# Altium PCB PCB2.PcbDoc
Units mil, origin at the board's own origin, x right, y up, seen from the top; angles counter-clockwise.
Board outline 1560 x 810 mil, 2 copper layers (Top Layer, Bottom Layer); 64 components, 103 nets, 334 pads, 4 vias.
Unrouted connection lines stored in the file: 122.
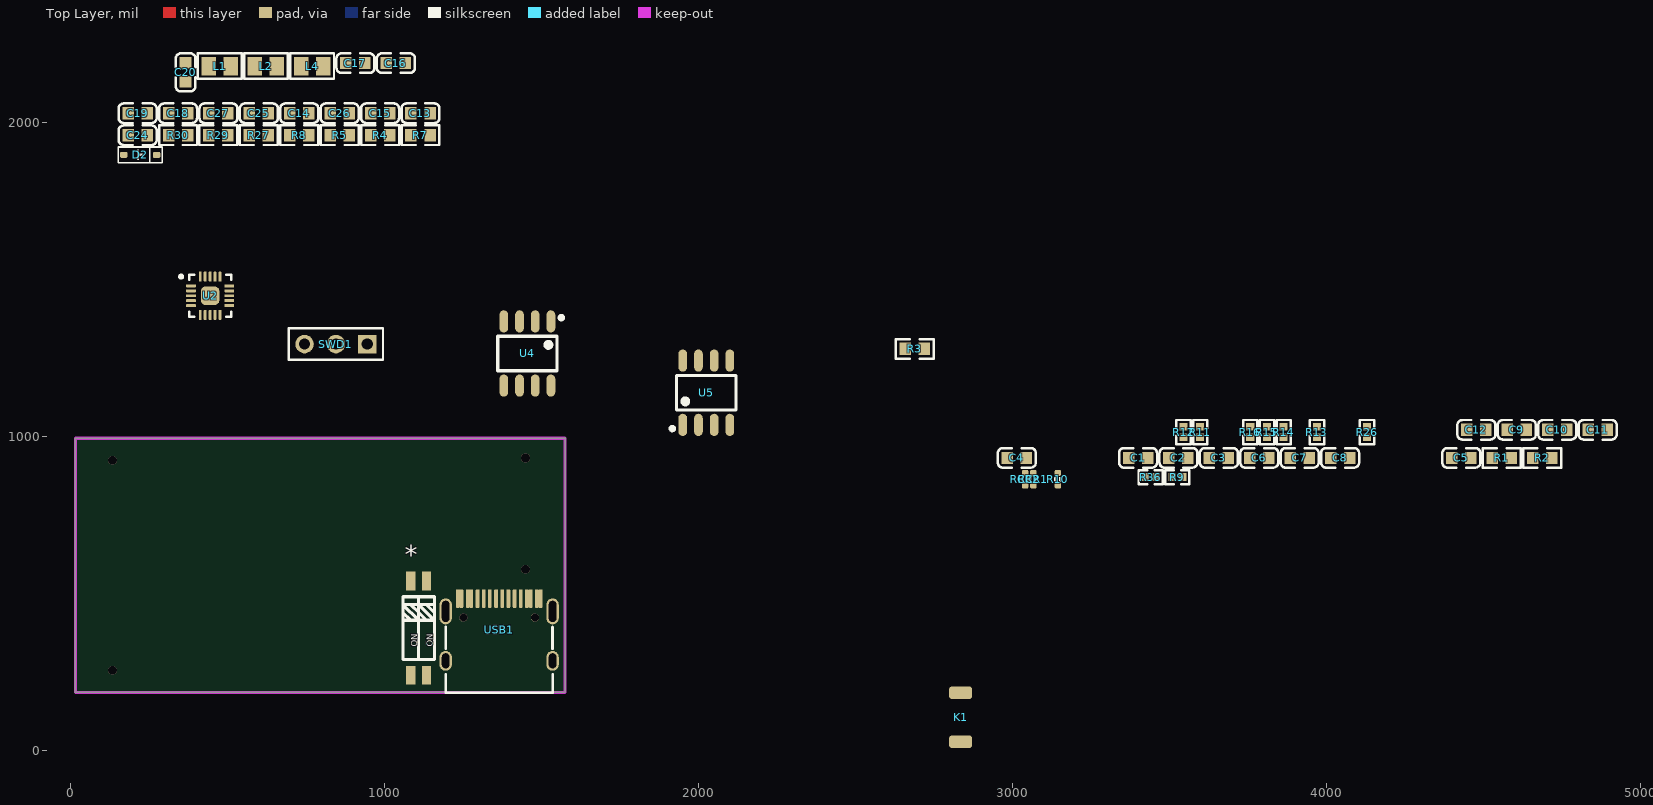
[diagram p0: Top Layer view]
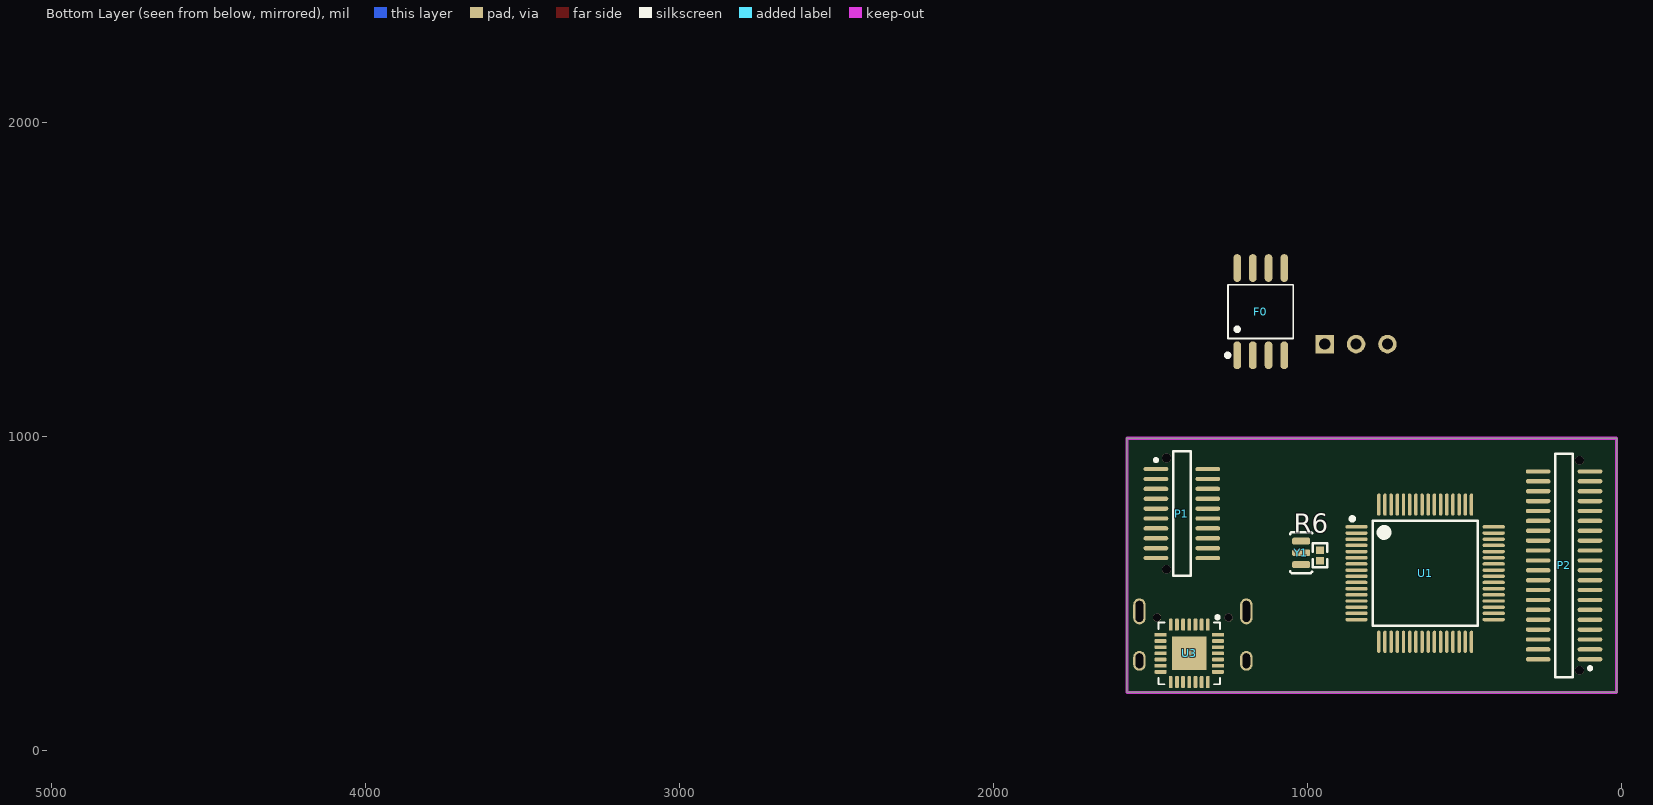
[diagram p1: Bottom Layer view, seen from below]

## Layer stack, top to bottom
Top Solder: solder mask 0.4, Solder Resist, Dk 3.5
Top Layer: signal copper 1.4
Dielectric 1: dielectric 12.6, FR-4, Dk 4.8
Bottom Layer: signal copper 1.4
Bottom Solder: solder mask 0.4, Solder Resist, Dk 3.5

## Board outline
15,185 15,995 1575,995 1575,185

## Design rules (kind name [scope] priority, off if disabled: settings)
Clearance [All] p1: gap=6 ignorepadtopadclearanceinfootprint=FALSE
ComponentClearance [All] p1: gap=0 collisioncheckmode=3 verticalgap=0 showdistances=FALSE
DiffPairsRouting [All] p1: maxlimit=9 minlimit=9 mostfreqgap=9 toplayer_minwidth=4 toplayer_maxwidth=4 toplayer_prefwidth=4 bottomlayer_minwidth=4 bottomlayer_maxwidth=4 bottomlayer_prefwidth=4 maxuncoupledlength=500
FanoutControl Fanout_BGA [All] p1: bgadir=Out bgaviamode=Centered fanoutstyle=Auto fanoutdirection=Alternating viagrid=1 // Fanout_BGA (Default Rule)
HoleSize [All] p1: absolutevalues=TRUE maxlimit=10000 minlimit=8 maxpercent=80.000 minpercent=20.000
MinimumSolderMaskSliver [All] p1 off: minsoldermaskwidth=2
PlaneClearance [All] p1: clearance=8
PlaneConnect [All] p1: planeconnectstyle=Direct reliefexpansion=20 reliefentries=4 reliefconductorwidth=10 reliefairgap=10
PolygonConnect [All] p1: connectstyle=Direct reliefconductorwidth=10 reliefentries=4 polygonreliefangle="90 Angle" airgapwidth=10
RoutingVias [All] p1: holewidth=8 width=16 viastyle="Through Hole" minholewidth=6 minwidth=12 maxholewidth=28 maxwidth=50
SilkToSilkClearance [All] p1: silktosilkclearance=0
SilkToSolderMaskClearance [IsPad] p1: minsilkscreentomaskgap=0 clearancetoexposedcopper=TRUE
SolderMaskExpansion [All] p1: expansion=3 istentingtop=FALSE
Width [All] p1: maxlimit=10000 minlimit=6 preferedwidth=6
21 further rules are at their usual default settings.

## Classes and differential pairs
component class Designator: C13 C14 C15 C16 C17 C18 C19 C20 C24 C25 C26 C27 D2 L1 L2 L4 R4 R5 R7 R8 R27 R29 R30 U2
component class main: * P1 P2 R26 R36 RCR1 RCR2 U4 U5
component class Designator: R9 R10 R11 R12 U3 USB1
differential pair CAN2: +CAN2_P -CAN2_N
differential pair CAN1: +CAN1_P -CAN1_N
differential pair USB: +USB_P -USB_N

## Components (designator, comment, footprint, x,y, rotation, side; value= is the part's Value field where it differs from the comment)
* "MC74HC126ADR2G" SW-SMD_4P 1075,350 r180 top
C1 "10uF (106) 10% 10V" LC-0603_C 3400.55,932.58 r0 top
C2 "100nF (104) 10% 50V" LC-0603_C 3529.29,932.58 r0 top
C3 "100nF (104) 10% 50V" LC-0603_C 3658.03,932.58 r0 top
C4 "100nF (104) 10% 50V" LC-0603_C 3014.33,932.58 r0 top
C5 "100nF (104) 10% 50V" LC-0603_C 4430.47,932.58 r0 top
C6 "100nF (104) 10% 50V" LC-0603_C 3786.77,932.58 r0 top
C7 "100nF (104) 10% 50V" LC-0603_C 3915.51,932.58 r0 top
C8 "100nF (104) 10% 50V" LC-0603_C 4044.25,932.58 r0 top
C9 "2.2uF (225) 10% 16V" LC-0603_C 4607.24,1021.95 r0 top
C10 "2.2uF (225) 10% 16V" LC-0603_C 4735.98,1021.95 r0 top
C11 "100nF (104) 10% 50V" LC-0603_C 4864.72,1021.95 r0 top
C12 "100nF (104) 10% 50V" LC-0603_C 4478.5,1021.95 r0 top
C13 "10uF (106) 10% 10V" LC-0603_C 1114.44,2030.42 r0 top
C14 "220pF (221) 10% 50V" LC-0603_C 728.22,2030.42 r0 top
C15 "100nF (104) 10% 50V" LC-0603_C 985.7,2030.42 r0 top
C16 "10uF (106) 10% 10V" LC-0603_C 1035.94,2189.96 r0 top
C17 "10uF (106) 10% 10V" LC-0603_C 907.2,2189.96 r0 top
C18 "220pF (221) 10% 50V" LC-0603_C 342,2030.42 r0 top
C19 "100nF (104) 10% 50V" LC-0603_C 213.26,2030.42 r0 top
C20 "10uF (106) 10% 10V" LC-0603_C 366.06,2160.63 r90 top
C24 "10uF (106) 10% 10V" LC-0603_C 213.26,1960.34 r0 top
C25 "10uF (106) 10% 10V" LC-0603_C 599.48,2030.42 r0 top
C26 "220pF (221) 10% 50V" LC-0603_C 856.96,2030.42 r0 top
C27 "100nF (104) 10% 50V" LC-0603_C 470.74,2030.42 r0 top
D2 "二极管-5819W" SOD-323 221.39,1897.8 r0 top
F0 "W25Q64JVSSIQ" W25Q64JVSSIQ 1180,1415 r180 bottom
K1 "TACT 2P" ButtonTACT_3x4x2_180 2835,106 r90 top value=3x4
L1 "2.2uH ±10%" LC-0805_L 474.72,2180.32 r0 top
L2 "2.2uH ±10%" LC-0805_L 621.97,2180.32 r0 top
L4 "2.2uH ±10%" LC-0805_L 769.21,2180.32 r0 top
P1 "Header 10X2" HEAER_0.8mm_2x10P_M 1400,755 r180 bottom
P2 "Header 20X2" HEADER_0.8mm_2x20P_G 182.32,590 r0 bottom
R1 "10KΩ (1002) ±1%" LC-0603_R 4559.21,932.58 r0 top
R2 "10KΩ (1002) ±1%" LC-0603_R 4687.95,932.58 r0 top
R3 "10KΩ (1002) ±1%" LC-0603_R 2689.68,1280 r0 top
R4 "510KΩ (5103) ±1%" LC-0603_R 985.7,1960.34 r0 top
R5 "110KΩ (1103) ±1%" LC-0603_R 856.96,1960.34 r0 top
R6 "1MΩ (1004) ±1%" LC-0402_R 960,621.73 r270 bottom
R7 "510KΩ (5103) ±1%" LC-0603_R 1114.44,1960.34 r0 top
R8 "110KΩ (1103) ±1%" LC-0603_R 728.22,1960.34 r0 top
R9 "10KΩ (1002) ±1%" LC-0402_R 3525.74,870.97 r0 top
R10 "200R" RES_0402 3144.96,864.54 r90 top value=22R
R11 "5.1KΩ (5101) ±1%" LC-0402_R 3598.58,1014.67 r90 top
R12 "5.1KΩ (5101) ±1%" LC-0402_R 3545.43,1014.67 r90 top
R13 "0Ω (0R0) ±1%" LC-0402_R 3970.63,1014.67 r90 top
R14 "0Ω (0R0) ±1%" LC-0402_R 3864.33,1014.67 r90 top
R15 "0Ω (0R0) ±1%" LC-0402_R 3811.18,1014.67 r90 top
R16 "0Ω (0R0) ±1%" LC-0402_R 3758.03,1014.67 r90 top
R26 "120Ω (1200) ±1%" LC-0402_R 4130.08,1014.67 r90 top
R27 "510KΩ (5103) ±1%" LC-0603_R 599.48,1960.34 r0 top
R29 "110KΩ (1103) ±1%" LC-0603_R 470.74,1960.34 r0 top
R30 "0Ω (0R0) ±1%" LC-0603_R 342,1960.34 r0 top
R36 "120Ω (1200) ±1%" LC-0402_R 3441.09,870.97 r0 top
RCR1 "10k(NC)" RES_0402 3066.96,864.54 r90 top value=22R
RCR2 "10k(NC)" RES_0402 3040.96,864.54 r90 top value=22R
SWD1 "Header 3" HDR1X3 945,1295 r180 top
U1 "STM32F405RGT6" LC-LQFP-64_10x10x05P 625,565 r270 bottom
U2 "EA3036" QFN-20 444.25,1448.98 r0 top
U3 "CP2102" QFN-28 1376.5,309.69 r270 bottom value=Value
U4 "CAN/SN65HVD230DR" LC-SOIC-8_150mil 1455,1265 r180 top
U5 "CAN/SN65HVD230DR" LC-SOIC-8_150mil 2025,1140 r0 top
USB1 "Type-C" Type-C-TOP 1365,385 r270 top
Y1 "8MHz" 晶振-3P 1020,630 r270 bottom

## Footprints (in the part's own frame and the unit in brackets; to place one, negate y for a bottom-side part, rotate by r counter-clockwise, add the part's x,y. Pads: shape width x height; smd on the part's side, far side on the other; paste and mask are expansions set on the pad)
ButtonTACT_3x4x2_180 [mil]
  rrect50% 40x74 smd: 1(-78,0) 2(78,0)
  body extent -79,-49 79,49, height 63
HDR1X3 [mm] "Connector; Header; 3 Position"
  rect 1.5x1.5 hole 0.9: 1(0,0)
  round 1.5 hole 0.9: 2(2.54,0) 3(5.08,0)
  silkscreen extent -1.27,-1.27 6.35,1.27
HEADER_0.8mm_2x20P_G [mm] "0.8间距2x20P公座，SMD"
  oval 2x0.35 smd: 1(-2.1,7.6) 2(-2.1,6.8) 3(-2.1,6) 4(-2.1,5.2) 5(-2.1,4.4) 6(-2.1,3.6) 7(-2.1,2.8) 8(-2.1,2) 9(-2.1,1.2) 10(-2.1,0.4) 11(-2.1,-0.4) 12(-2.1,-1.2) 13(-2.1,-2) 14(-2.1,-2.8) 15(-2.1,-3.6) 16(-2.1,-4.4) 17(-2.1,-5.2) 18(-2.1,-6) 19(-2.1,-6.8) 20(-2.1,-7.6) 21(2.1,-7.6) 22(2.1,-6.8) 23(2.1,-6) 24(2.1,-5.2) 25(2.1,-4.4) 26(2.1,-3.6) 27(2.1,-2.8) 28(2.1,-2) 29(2.1,-1.2) 30(2.1,-0.4) 31(2.1,0.4) 32(2.1,1.2) 33(2.1,2) 34(2.1,2.8) 35(2.1,3.6) 36(2.1,4.4) 37(2.1,5.2) 38(2.1,6) 39(2.1,6.8) 40(2.1,7.6)
  silkscreen extent -2.22,-9.05 0.7,9.05, body extent -1.1,-9.05 1.1,9.05, height 2
HEAER_0.8mm_2x10P_M [mm] "底座，20*2P,公座"
  oval 2x0.35 smd: 1(-2.1,3.6) 2(-2.1,2.8) 3(-2.1,2) 4(-2.1,1.2) 5(-2.1,0.4) 6(-2.1,-0.4) 7(-2.1,-1.2) 8(-2.1,-2) 9(-2.1,-2.8) 10(-2.1,-3.6) 11(2.1,-3.6) 12(2.1,-2.8) 13(2.1,-2) 14(2.1,-1.2) 15(2.1,-0.4) 16(2.1,0.4) 17(2.1,1.2) 18(2.1,2) 19(2.1,2.8) 20(2.1,3.6)
  silkscreen extent -2.23,-5.05 0.7,5.05, body extent -2.51,-4.96 2.45,4.94, height 6
LC-0402_R [mm]
  rect 0.6x0.65 smd mask+0.051: 1(-0.425,0) 2(0.425,0)
  silkscreen extent -0.97,-0.58 0.97,0.58, body extent -0.57,-0.27 0.58,0.28, height 0.41
LC-0603_C [mm]
  rect 0.93x0.98 smd: 1(-0.77,0) 2(0.77,0)
  silkscreen extent -1.53,-0.79 1.54,0.79, body extent -0.8,-0.4 0.8,0.4, height 0.3
LC-0603_R [mm]
  rect 0.93x0.98 smd: 1(-0.77,0) 2(0.77,0)
  silkscreen extent -1.53,-0.79 1.54,0.79, body extent -0.85,-0.4 0.85,0.4, height 0.56
LC-0805_L [mm]
  rect 1.16x1.47 smd: 1(-0.89,0) 2(0.89,0)
  silkscreen extent -1.77,-1.04 1.77,1.03, body extent -1.02,-0.64 1.03,0.64, height 0.6
LC-LQFP-64_10x10x05P [mm]
  oval 0.28x1.8 smd mask+0.051: 1(-3.75,-5.55) 2(-3.25,-5.55) 3(-2.75,-5.55) 4(-2.25,-5.55) 5(-1.75,-5.55) 6(-1.25,-5.55) 7(-0.75,-5.55) 8(-0.25,-5.55) 9(0.25,-5.55) 10(0.75,-5.55) 11(1.25,-5.55) 12(1.75,-5.55) 13(2.25,-5.55) 14(2.75,-5.55) 15(3.25,-5.55) 16(3.75,-5.55) 33(3.75,5.55) 34(3.25,5.55) 35(2.75,5.55) 36(2.25,5.55) 37(1.75,5.55) 38(1.25,5.55) 39(0.75,5.55) 40(0.25,5.55) 41(-0.25,5.55) 42(-0.75,5.55) 43(-1.25,5.55) 44(-1.75,5.55) 45(-2.25,5.55) 46(-2.75,5.55) 47(-3.25,5.55) 48(-3.75,5.55)
  oval 1.8x0.28 smd mask+0.051: 17(5.55,-3.75) 18(5.55,-3.25) 19(5.55,-2.75) 20(5.55,-2.25) 21(5.55,-1.75) 22(5.55,-1.25) 23(5.55,-0.75) 24(5.55,-0.25) 25(5.55,0.25) 26(5.55,0.75) 27(5.55,1.25) 28(5.55,1.75) 29(5.55,2.25) 30(5.55,2.75) 31(5.55,3.25) 32(5.55,3.75) 49(-5.55,3.75) 50(-5.55,3.25) 51(-5.55,2.75) 52(-5.55,2.25) 53(-5.55,1.75) 54(-5.55,1.25) 55(-5.55,0.75) 56(-5.55,0.25) 57(-5.55,-0.25) 58(-5.55,-0.75) 59(-5.55,-1.25) 60(-5.55,-1.75) 61(-5.55,-2.25) 62(-5.55,-2.75) 63(-5.55,-3.25) 64(-5.55,-3.75)
  silkscreen extent -4.55,-6.05 4.25,4.25
LC-SOIC-8_150mil [mm]
  oval 0.7x1.8 smd: 1(-1.905,-2.6) 2(-0.635,-2.6) 3(0.635,-2.6) 4(1.905,-2.6) 5(1.905,2.6) 6(0.635,2.6) 7(-0.635,2.6) 8(-1.905,2.6)
  silkscreen extent -2.9,-3.05 2.4,1.4
QFN-20 [mm]
  rrect50% 0.8x0.24 smd: 1(-1.55,0.8) 2(-1.55,0.4) 3(-1.55,0) 4(-1.55,-0.4) 5(-1.55,-0.8) 11(1.55,-0.8) 12(1.55,-0.4) 13(1.55,0) 14(1.55,0.4) 15(1.55,0.8)
  rrect50% 0.24x0.8 smd: 6(-0.8,-1.55) 7(-0.4,-1.55) 8(0,-1.55) 9(0.4,-1.55) 10(0.8,-1.55) 16(0.8,1.55) 17(0.4,1.55) 18(0,1.55) 19(-0.4,1.55) 20(-0.8,1.55)
  rrect50% 1.5x1.5 smd: 21(0,0)
  silkscreen extent -2.47,-1.7 1.7,1.7, body extent -1.56,-1.56 1.56,1.56, height 0.8
QFN-28 [mil]
  rrect50% 38x12 smd mask+5: 1(-91.5,59.06) 2(-91.5,39.37) 3(-91.5,19.68) 4(-91.5,0) 5(-91.5,-19.68) 6(-91.5,-39.37) 7(-91.5,-59.06) 15(91.5,-59.06) 16(91.5,-39.37) 17(91.5,-19.68) 18(91.5,0) 19(91.5,19.68) 20(91.5,39.37) 21(91.5,59.06)
  rrect50% 12x38 smd mask+5: 8(-59.06,-91.5) 9(-39.37,-91.5) 10(-19.69,-91.5) 11(0,-91.5) 12(19.68,-91.5) 13(39.37,-91.5) 14(59.06,-91.5) 22(59.06,91.5) 23(39.37,91.5) 24(19.69,91.5) 25(0,91.5) 26(-19.68,91.5) 27(-39.37,91.5) 28(-59.06,91.5)
  rect 106.3x110.24 smd: 29(0,0)
  silkscreen extent -120,-99 99,99, body extent -99,-99 98,98, height 35
RES_0402 [mil]
  rrect50% 20x20 smd: 1(-20,0) 2(20,0)
  silkscreen extent -7,-10 7,10, body extent -20,-10 20,10, height 14
SOD-323 [mm]
  rrect50% 0.6x0.5 smd: 1(-1.329,0) 2(1.329,0)
  silkscreen extent -1.78,-0.64 1.78,0.64, body extent -1.3,-0.68 1.3,0.67, height 1.15
SW-SMD_4P [mil]
  rect 30x60 smd: 1(-8.5,110) 2(-58.5,110) 3(-58.5,-190) 4(-8.5,-190)
  silkscreen extent -84,-140 16,60
Type-C-TOP [mm]
  round 0.65 hole 0.65: 0(-0.98,2.89) 0(-0.98,-2.89)
  oval 1.6x1 hole 0.6 slot 1.2 at 0 deg: 1(2.52,4.325) 2(2.52,-4.325)
  oval 2.1x1 hole 0.6 slot 1.7 at 0 deg: 3(-1.48,-4.325) 4(-1.48,4.325)
  rrect50% 1.5x0.3 smd: A1(-2.52,-3.35) A4(-2.52,-2.55) A5(-2.52,-1.25) A6(-2.52,-0.25) A7(-2.52,0.25) A8(-2.52,1.25) A9(-2.52,2.55) A12(-2.52,3.35) B1(-2.52,3.05) B4(-2.52,2.25) B5(-2.52,1.75) B6(-2.52,0.75) B7(-2.52,-0.75) B8(-2.52,-1.75) B9(-2.52,-2.25) B12(-2.52,-3.05)
  silkscreen extent -0.22,-4.33 5.12,4.33, body extent -2.57,-4.48 5.18,4.47, height 3.26
W25Q64JVSSIQ [mm]
  oval 0.63x2.25 smd: 1(-1.115,-3.955) 2(0.155,-3.955) 3(1.425,-3.955) 4(2.695,-3.955) 5(2.695,3.105) 6(1.425,3.105) 7(0.155,3.105) 8(-1.115,3.105)
  silkscreen extent -2.03,-4.11 3.43,1.75
晶振-3P [mm]
  rrect50% 0.55x1.45 smd: 1(-0.95,0) 2(0,0) 3(0.95,0)
  silkscreen extent -1.65,-0.89 1.65,0.91, body extent -1.6,-0.89 1.65,0.89, height 0.7

## Part data
C1 C13 C16 C17 C20 C24 C25: library part "0603 10uF (106) 10% 10V", "贴片电容", Package=0603, SuppliersPartNumber=C19702, ComponentLink1Description=供应商链接, ComponentLink1URL=http://www.szlcsc.com/product/details_20411.html, Supplier=LC
C2 C3 C4 C5 C6 C7 C8 C11 C12 C15 C19 C27: library part "0603 100nF (104) 10% 50V", "贴片电容", Package=0603, SuppliersPartNumber=C14663, ComponentLink1Description=供应商链接, ComponentLink1URL=http://www.szlcsc.com/product/details_15331.html, Supplier=LC
C9 C10: library part "0603 2.2uF (225) 10% 16V", "贴片电容", Package=0603, SuppliersPartNumber=C23630, ComponentLink1Description=供应商链接, ComponentLink1URL=http://www.szlcsc.com/product/details_24366.html, Supplier=LC
C14 C18 C26: library part "0603 220pF (221) 10% 50V", "贴片电容", Package=0603, SuppliersPartNumber=C1603, ComponentLink1Description=供应商链接, ComponentLink1URL=http://www.szlcsc.com/product/details_1955.html, Supplier=LC
D2: "40V"
K1: library part ButtonTACT_3x4x2_180, "Button", Type="TACT 2P"
L1 L2 L4: library part "0805 2.2uH 10%", "贴片电感", Package=0805, SuppliersPartNumber=C1043, ComponentLink1Description=供应商链接, ComponentLink1URL=http://www.szlcsc.com/product/details_1395.html, Supplier=LC
P1: "Header, 10-Pin, Dual row", LatestRevisionDate=17-Jul-2002, LatestRevisionNote="Re-released for DXP Platform.", Publisher="Altium Limited"
P2: "Header, 20-Pin, Dual row", LatestRevisionDate=17-Jul-2002, LatestRevisionNote="Re-released for DXP Platform.", Publisher="Altium Limited"
R1 R2 R3: library part "0603 10KΩ (1002) 1%", "贴片电阻", Package=0603, SuppliersPartNumber=C25804, ComponentLink1Description=供应商链接, ComponentLink1URL=http://www.szlcsc.com/product/details_26547.html, Supplier=LC
R4 R7 R27: library part "0603 510KΩ (5103) 1%", "贴片电阻", Package=0603, SuppliersPartNumber=C23192, ComponentLink1Description=供应商链接, ComponentLink1URL=http://www.szlcsc.com/product/details_23919.html, Supplier=LC
R5 R8 R29: library part "0603 110KΩ (1103) 1%", "贴片电阻", Package=0603, SuppliersPartNumber=C25805, ComponentLink1Description=供应商链接, ComponentLink1URL=http://www.szlcsc.com/product/details_26548.html, Supplier=LC
R6: library part "0402 1MΩ (1004) 1%", "贴片电阻", Package=0402, SuppliersPartNumber=C26083, ComponentLink1Description=供应商链接, ComponentLink1URL=http://www.szlcsc.com/product/details_26826.html, Supplier=LC
R9: library part "0402 10KΩ (1002) 1%", "贴片电阻", Package=0402, SuppliersPartNumber=C25744, ComponentLink1Description=供应商链接, ComponentLink1URL=http://www.szlcsc.com/product/details_26487.html, Supplier=LC
R10 RCR1 RCR2: library part 电阻-0402, "Resistor"
R11 R12: library part "0402 5.1KΩ (5101) 1%", "贴片电阻", Package=0402, SuppliersPartNumber=C25905, ComponentLink1Description=供应商链接, ComponentLink1URL=http://www.szlcsc.com/product/details_26648.html, Supplier=LC
R13 R14 R15 R16: library part "0402 0Ω (0R0) 1%", "贴片电阻", Package=0402, SuppliersPartNumber=C17168, ComponentLink1Description=供应商链接, ComponentLink1URL=http://www.szlcsc.com/product/details_17853.html, Supplier=LC
R26 R36: library part "0402 120Ω (1200) 1%", "贴片电阻", Package=0402, SuppliersPartNumber=C25079, ComponentLink1Description=供应商链接, ComponentLink1URL=http://www.szlcsc.com/product/details_25822.html, Supplier=LC
R30: library part "0603 0Ω (0R0) 1%", "贴片电阻", Package=0603, SuppliersPartNumber=C21189, ComponentLink1Description=供应商链接, ComponentLink1URL=http://www.szlcsc.com/product/details_21903.html, Supplier=LC
SWD1: "Header, 3-Pin", LatestRevisionDate=17-Jul-2002, LatestRevisionNote="Re-released for DXP Platform.", Publisher="Altium Limited"
U1: "ARM", Package=LQFP-64_10x10x05P, SuppliersPartNumber=C15742, ComponentLink1Description=供应商链接, ComponentLink1URL=http://www.szlcsc.com/product/details_16424.html, Supplier=LC
U2: "EA3036 is a 3CH power management IC for applications powered by one Li-Ion battery or a DC 5V adapter."
U3: "USB转TTL", MFG #1="SILICON LABS", PART DESC="SINGLE-CHIP USB TO UART BRIDGE, QFN28, RoHS.", PART NUMBER=CP2102, RefDes=RefDes, Type=DEV
U4 U5: "CAN", Package=SOIC-8_150mil, SuppliersPartNumber=C12084, ComponentLink1Description=供应商链接, ComponentLink1URL=http://www.szlcsc.com/product/details_12661.html, Supplier=LC
USB1: library part USB-Type-C-TOP
Y1: library part 晶振-3Pin, "村田贴片"

## Via types
v1: diameter 27.56, hole 27.56, Top Layer to Bottom Layer, 4 vias

## Nets (pads, with @x,y where several pads share a name; then routed paths per layer and width w, separated by ;. In a path a pad name is that pad's centre, name@x,y a point inside that pad or via, vN(x,y) a via of type N, cw(c..) or ccw(c..) an arc to the next point about the centre after c; other vN are vias at no path point)
3V3: C24.2 C26.2 C27.2 L4.2 R27.2 U4.3 U5.3
3V3: 
AGND: R30.1
AGND: C1.1 C2.2 U1.12
AVCC3V3: C1.2 C2.1 U1.13
AVCC3V3: C13.2 C14.2 C15.2 L1.2 R4.2
BOOT0: R1.1 U1.60
BOOT1: R2.1 U1.28
CAN1_N: R36.1 U4.6
CAN1_P: *.3 U4.7
CAN1_Rx: U4.4
CAN1_Tx: U4.1
CAN2_N: R26.1 U5.6
CAN2_P: *.4 U5.7
CAN2_Rx: U5.4
CAN2_Tx: U5.1
EN3: U2.18
GND: C13.1 C15.1 C16.2 C17.1 C19.1 C20.2 C24.1 C25.2 C27.1 R5.1 R8.1 R29.1 R30.2 U2.1 U2.4 U2.5 U2.12 U2.13 U2.15 U2.17 U2.21
GND: C3.1 C4.1 C5.1 C6.1 C7.1 C8.1 C9.2 C10.2 C11.1 K1.2 R15.1 R16.1 SWD1.1 U1.18 U1.63 Y1.2
Net*_1: *.1 R26.2
Net*_2: *.2 R36.2
NetC9_1: C9.1 U1.47
NetC10_1: C10.1 U1.31
NetC11_2: C11.2 K1.1 R3.2 U1.7
NetC14_1: C14.1 R4.1 R5.2 U2.14
NetC18_1: C18.1 R7.1 R8.2 U2.3
NetC26_1: C26.1 R27.1 R29.2 U2.2
NetF0_1: F0.1
NetF0_2: F0.2
NetF0_5: F0.5
NetF0_6: F0.6
NetL1_1: L1.1 U2.11
NetL2_1: L2.1 U2.6
NetL4_1: L4.1 U2.20
NetR1_2: R1.2 R13.1 R15.2
NetR2_2: R2.2 R14.1 R16.2
NetR6_1: R6.1 U1.5 Y1.1
NetR6_2: R6.2 U1.6 Y1.3
NetR9_1: R9.1 U3.9
NetR10_2: R10.2 U3.26
NetR11_2: R11.2 USB1.A5
NetR12_2: R12.2 USB1.B5
NetRCR1_1: RCR1.1 U4.8
NetRCR2_1: RCR2.1 U5.8
NetU1_2: U1.2
NetU1_3: U1.3
NetU1_4: U1.4
NetU1_8: U1.8
NetU1_9: U1.9
NetU1_10: U1.10
NetU1_11: U1.11
NetU1_14: U1.14
NetU1_15: U1.15
NetU1_16: U1.16
NetU1_17: U1.17
NetU1_20: U1.20
NetU1_21: U1.21
NetU1_22: U1.22
NetU1_23: U1.23
NetU1_24: U1.24
NetU1_25: U1.25
NetU1_26: U1.26
NetU1_27: U1.27
NetU1_29: U1.29
NetU1_30: U1.30
NetU1_33: U1.33
NetU1_34: U1.34
NetU1_35: U1.35
NetU1_36: U1.36
NetU1_37: U1.37
NetU1_38: U1.38
NetU1_39: U1.39
NetU1_40: U1.40
NetU1_41: U1.41
NetU1_42: U1.42
NetU1_43: U1.43
NetU1_44: U1.44
NetU1_45: U1.45
NetU1_50: U1.50
NetU1_51: U1.51
NetU1_52: U1.52
NetU1_53: U1.53
NetU1_54: U1.54
NetU1_55: U1.55
NetU1_56: U1.56
NetU1_57: U1.57
NetU1_58: U1.58
NetU1_59: U1.59
NetU1_61: U1.61
NetU1_62: U1.62
SWCLK: SWD1.2 U1.49
SWDIO: SWD1.3 U1.46
UART_RX: R10.1
UART_TX: U3.25
USB_DM_CP: U3.5 USB1.B7
USB_DP_CP: U3.4 USB1.B6
USB_N: USB1.A7
USB_P: USB1.A6
VBUS: D2.1
VBUS: R9.2 U3.7 U3.8 USB1.A4 USB1.A9 USB1.B4 USB1.B9
VCC3V3: C17.2 C18.2 C19.2 L2.2 R7.2
VCC3V3: C3.2 C4.2 C5.2 C6.2 C7.2 C8.2 R3.1 R13.2 R14.2 U1.1 U1.19 U1.32 U1.48 U1.64
VCC_5V: C16.1 C20.1 C25.1 D2.2 U2.7 U2.8 U2.9 U2.10 U2.16 U2.19
pads on no net: C12.1 C12.2 F0.3 F0.4 F0.7 F0.8 P1.1 P1.2 P1.3 P1.4 P1.5 P1.6 P1.7 P1.8 P1.9 P1.10 P1.11 P1.12 P1.13 P1.14 P1.15 P1.16 P1.17 P1.18 P1.19 P1.20 P2.1 P2.2 P2.3 P2.4 P2.5 P2.6 P2.7 P2.8 P2.9 P2.10 P2.11 P2.12 P2.13 P2.14 P2.15 P2.16 P2.17 P2.18 P2.19 P2.20 P2.21 P2.22 P2.23 P2.24 P2.25 P2.26 P2.27 P2.28 P2.29 P2.30 P2.31 P2.32 P2.33 P2.34 P2.35 P2.36 P2.37 P2.38 P2.39 P2.40 R11.1 R12.1 RCR1.2 RCR2.2 U3.1 U3.2 U3.3 U3.6 U3.10 U3.11 U3.12 U3.13 U3.14 U3.15 U3.16 U3.17 U3.18 U3.19 U3.20 U3.21 U3.22 U3.23 U3.24 U3.27 U3.28 U3.29 U4.2 U4.5 U5.2 U5.5 USB1.0 USB1.1 USB1.2 USB1.3 USB1.4 USB1.A1 USB1.A8 USB1.A12 USB1.B1 USB1.B8 USB1.B12
copper on no net:
  other v1: 133.11,255.35 1449.21,577.83 133.11,924.65 1449.21,932.17

## Keep-outs
Keep-Out Layer:
  the board outline again, w10

## Text inside footprints (layer, text, board x,y; h text height)
*: Top Overlay "ON" at 1153.5,330 h20 r90; Top Overlay "ON" at 1103.5,330 h20 r90